# EAGLE board Maxim 7219 LED Display v1.1 (EAGLE 7.0.0)
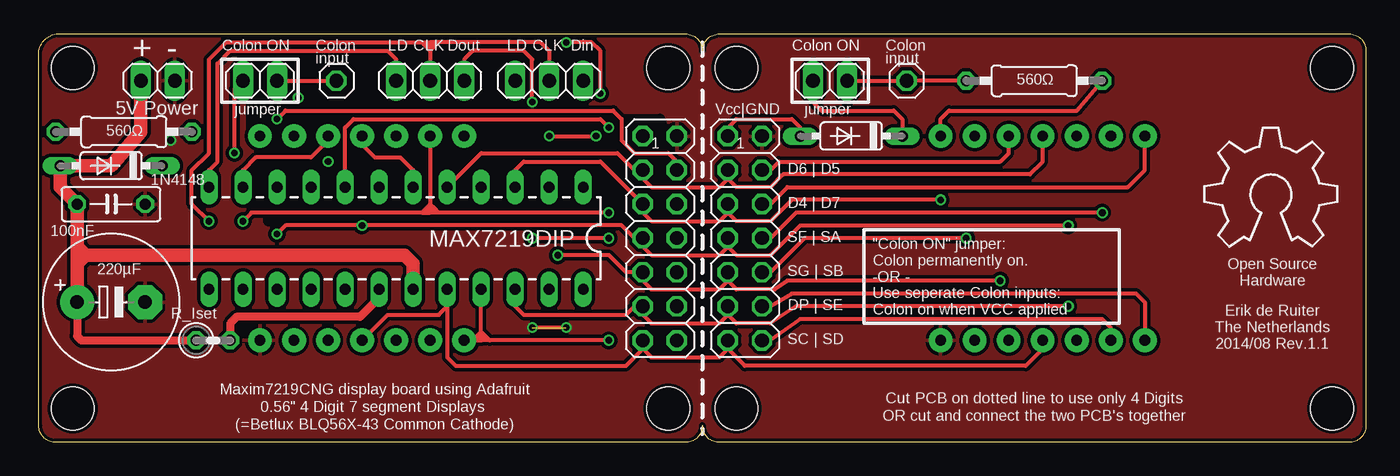
[diagram p0: board, top side]
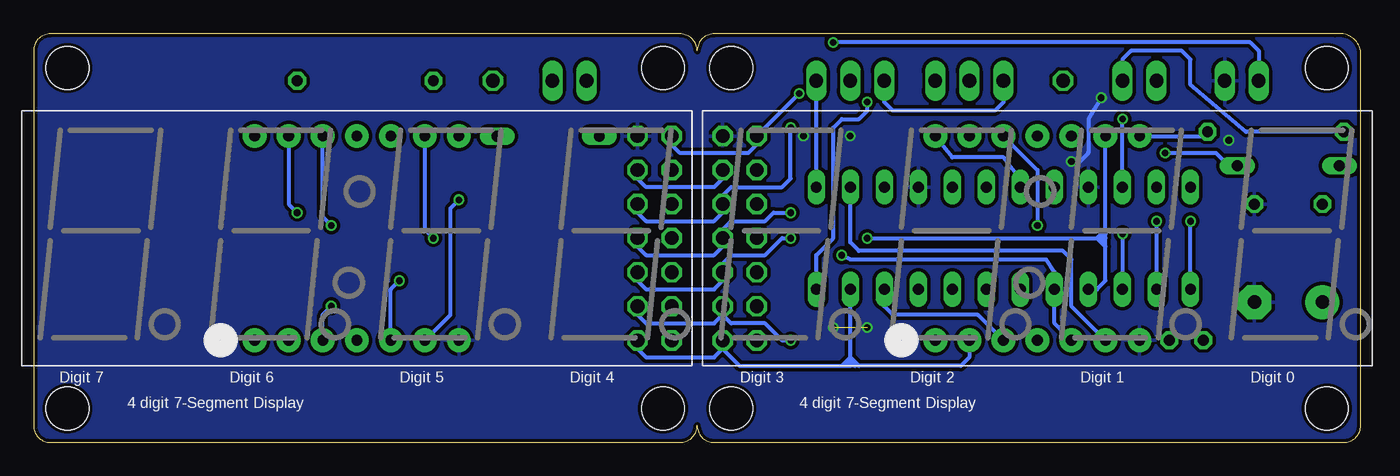
[diagram p1: board, bottom side, seen from below]

Size 99.06 x 30.51 mm. Coordinates in mm from the lower left corner, seen from the top.
Outline: 1.91,30.48 48.26,30.48 arc-90 49.53,29.21 arc-90 50.8,30.48 97.79,30.48 arc-90 99.06,29.21 99.06,1.27 arc-90 97.79,0 50.8,0 arc-90 49.53,1.27 arc-90 48.26,0 1.27,0 arc-90 0,1.27 0,29.21 arc-90 1.91,30.48
Copper layers (1*16): Top 0.035mm / dielectric 1.5mm / Bottom 0.035mm
Design rules "ITEADstudio_DRC": minimum track width 6mil, minimum drill 12mil, track to track 6mil, track to pad 6mil, pad to pad 6mil, via to via 6mil, smd to smd 0mil, copper to edge 10mil, drill to drill 10mil, minimum pad ring 10mil, minimum via ring 6mil, stop-mask expansion 2mil, vias tented up to drill 100mil, thermal gap 10mil
Holes 3.2 mm at 2.54,27.94 2.54,2.54 46.99,27.94 52.07,27.94 46.99,2.54 52.07,2.54 96.52,2.54 96.52,27.94
tRestrict: area 28.6,16.5 to 47.6,24.1; area 17.1,16.5 to 23.5,22.2; area 15.9,23.5 to 20.3,27.9; area 53.9,24.1 to 54.1,24.1

## Footprints (pad centres in the part's own frame; a part is rotated, then mirrored left to right if it is on the bottom)
SEGMENT-BL-Q56C43 = drill 0.8 pad 1.778: P$1 -7.62,-7.62; P$2 -5.08,-7.62; P$3 -2.54,-7.62; P$4 0,-7.62; P$5 2.54,-7.62; P$6 5.08,-7.62; P$7 7.62,-7.62; P$8 7.62,7.62; P$9 5.08,7.62; P$10 2.54,7.62; P$11 0,7.62; P$12 -2.54,7.62; P$13 -5.08,7.62; P$14 -7.62,7.62
E5-10,5 = drill 1.016 pad 2.54: + -2.54,0 | drill 1.016 pad 2.54 octagon: - 2.54,0
C050-025X075 = drill 0.813 octagon: 1 -2.54,0; 2 2.54,0
DO35-7 = drill 0.813 long: A 3.81,0; C -3.81,0
1X03 = drill 1.016 long: 1 -2.54,0; 2 0,0; 3 2.54,0
2X07 = drill 1.016 octagon: 1 -7.62,-1.27; 2 -7.62,1.27; 3 -5.08,-1.27; 4 -5.08,1.27; 5 -2.54,-1.27; 6 -2.54,1.27; 7 0,-1.27; 8 0,1.27; 9 2.54,-1.27; 10 2.54,1.27; 11 5.08,-1.27; 12 5.08,1.27; 13 7.62,-1.27; 14 7.62,1.27
1X01 = drill 1.016 octagon: 1 0,0
1X02 = drill 1.016 long: 1 -1.27,0; 2 1.27,0
0207/10 = drill 0.813 octagon: 1 -5.08,0; 2 5.08,0
0207/2V = drill 0.813 octagon: 1 -1.27,0; 2 1.27,0
DIL24 = drill 0.813 long: 1 -13.97,-3.81; 2 -11.43,-3.81; 3 -8.89,-3.81; 4 -6.35,-3.81; 5 -3.81,-3.81; 6 -1.27,-3.81; 7 1.27,-3.81; 8 3.81,-3.81; 9 6.35,-3.81; 10 8.89,-3.81; 11 11.43,-3.81; 12 13.97,-3.81; 13 13.97,3.81; 14 11.43,3.81; 15 8.89,3.81; 16 6.35,3.81; 17 3.81,3.81; 18 1.27,3.81; 19 -1.27,3.81; 20 -3.81,3.81; 21 -6.35,3.81; 22 -8.89,3.81; 23 -11.43,3.81; 24 -13.97,3.81

## Placement (x,y rotation side)
BL-Q56C-43UHR-1  4 digit 7-Segment Display  [SEGMENT-BL-Q56C43]  74.93,15.24 0 bottom
BL-Q56C-43UHR-11  4 digit 7-Segment Display  [SEGMENT-BL-Q56C43]  24.13,15.24 0 bottom
C3  220µF  [E5-10,5]  5.4,10.48 0 top
C4  100nF  [C050-025X075]  5.4,17.78 0 top
D2  1N4148  [DO35-7]  60.64,22.86 180 top
D3  1N4148  [DO35-7]  5.4,20.64 180 top
INPUT  [1X03]  38.1,26.99 180 top
LEFT  [2X07]  46.35,15.24 270 top
LEFT_COLON_EXTERNAL  M01SMDNS  [1X01]  64.77,26.99 0 top
LEFT_COLON_JUMPER_SELECT  [1X02]  59.05,26.99 180 top
OUTPUT  [1X03]  29.21,26.99 180 top
POWER  [1X02]  8.89,26.99 180 top
RCOLON1  560Ω  [0207/10]  6.35,23.18 0 top
RCOLON2  560Ω  [0207/10]  74.3,26.99 0 top
RIGHT  [2X07]  52.7,15.24 270 top
RIGHT_COLON_EXTERNAL  [1X01]  22.23,26.99 0 top
RIGHT_COLON_JUMPER_SELECT  [1X02]  16.51,26.99 180 top
RSET  [0207/2V]  13.02,7.62 0 top
U$2  [OSHW_8X350_NOTEXT]  87,14.61 0 top
U$3  MAX7219DIP  [DIL24]  26.67,15.24 180 top

## Library data of the parts
BL-Q56C-43UHR-1 BL-Q56C-43UHR-11 = microbuilder
C3 C4 RCOLON1 RCOLON2 RSET = rcl
D2 D3 = diode
INPUT LEFT LEFT_COLON_EXTERNAL LEFT_COLON_JUMPER_SELECT OUTPUT POWER RIGHT RIGHT_COLON_EXTERNAL RIGHT_COLON_JUMPER_SELECT = pinhead
U$2 = OpenSourceHardwareLogo
U$3 = SparkFun-DigitalIC

## Nets
CLK: INPUT.2 OUTPUT.2 U$3.13
DIG_0: BL-Q56C-43UHR-11.P$6 U$3.2
DIG_1: BL-Q56C-43UHR-11.P$10 U$3.11
DIG_2: BL-Q56C-43UHR-11.P$11 U$3.6
DIG_3: BL-Q56C-43UHR-11.P$14 U$3.7
DIG_4: BL-Q56C-43UHR-1.P$6 LEFT.5 RIGHT.5 U$3.3
DIG_5: BL-Q56C-43UHR-1.P$10 LEFT.4 RIGHT.4 U$3.10
DIG_6: BL-Q56C-43UHR-1.P$11 LEFT.3 RIGHT.3 U$3.5
DIG_7: BL-Q56C-43UHR-1.P$14 LEFT.6 RIGHT.6 U$3.8
DIN: INPUT.1 U$3.1
DOUT: OUTPUT.1 U$3.24
GND: BL-Q56C-43UHR-1.P$7 BL-Q56C-43UHR-11.P$7 C3.- C4.2 LEFT.2 POWER.1 RIGHT.2 U$3.4 U$3.9
LOAD: INPUT.3 OUTPUT.3 U$3.12
N$1: D2.C LEFT_COLON_JUMPER_SELECT.2
N$2: LEFT_COLON_EXTERNAL.1 LEFT_COLON_JUMPER_SELECT.1 RCOLON2.1
N$3: BL-Q56C-43UHR-1.P$8 RCOLON2.2
N$4: BL-Q56C-43UHR-11.P$8 RCOLON1.2
N$6: D3.C RIGHT_COLON_JUMPER_SELECT.2
N$7: RCOLON1.1 RIGHT_COLON_EXTERNAL.1 RIGHT_COLON_JUMPER_SELECT.1
N$9: RSET.2 U$3.18
SEG_A: BL-Q56C-43UHR-1.P$13 BL-Q56C-43UHR-11.P$13 LEFT.8 RIGHT.8 U$3.14
SEG_B: BL-Q56C-43UHR-1.P$9 BL-Q56C-43UHR-11.P$9 LEFT.10 RIGHT.10 U$3.16
SEG_C: BL-Q56C-43UHR-1.P$4 BL-Q56C-43UHR-11.P$4 LEFT.13 RIGHT.13 U$3.20
SEG_D: BL-Q56C-43UHR-1.P$2 BL-Q56C-43UHR-11.P$2 LEFT.14 RIGHT.14 U$3.23
SEG_DP: BL-Q56C-43UHR-1.P$3 BL-Q56C-43UHR-11.P$3 LEFT.11 RIGHT.11 U$3.22
SEG_E: BL-Q56C-43UHR-1.P$1 BL-Q56C-43UHR-11.P$1 LEFT.12 RIGHT.12 U$3.21
SEG_F: BL-Q56C-43UHR-1.P$12 BL-Q56C-43UHR-11.P$12 LEFT.7 RIGHT.7 U$3.15
SEG_G: BL-Q56C-43UHR-1.P$5 BL-Q56C-43UHR-11.P$5 LEFT.9 RIGHT.9 U$3.17
VCC: C3.+ C4.1 D2.A D3.A LEFT.1 POWER.2 RIGHT.1 RSET.1 U$3.19

## Tracks (layer width: path | path; a pad name or v marks a point on that pad's centre or on a via)
CLK  (via drill 0.5 pad 0.25)
  Top 0.305: 29.21,29.84 29.21,29.21 | 29.21,29.21 OUTPUT.2 | 29.84,29.84 37.47,29.84 38.1,29.21 INPUT.2 | 29.84,29.84 29.21,29.84 | v12.7,16.51 11.43,17.78 11.43,20.32 12.7,21.59 12.7,28.57 13.97,29.84 28.57,29.84 | 28.57,29.84 29.21,29.84 | 28.57,29.84 28.89,29.53 | 28.89,29.53 29.21,29.21 | 29.21,29.21 29.84,29.84 | 29.84,29.84 28.89,29.53
  Bottom 0.305: U$3.13 v12.7,16.51
DIG_0
  Bottom 0.305: BL-Q56C-43UHR-11.P$6 21.59,10.16 21.59,13.65 22.23,14.29 37.47,14.29 38.1,14.92 U$3.2
DIG_1
  Top 0.305: BL-Q56C-43UHR-11.P$10 21.59,22.54 20.32,21.27 16.19,21.27 15.24,20.32 U$3.11
DIG_2
  Top 0.305: BL-Q56C-43UHR-11.P$11 24.13,22.22 25.08,21.27 26.99,21.27 27.94,20.32 U$3.6
DIG_3
  Bottom 0.305: U$3.7 25.4,19.68 26.67,21.27 30.48,21.27 BL-Q56C-43UHR-11.P$14
DIG_4  (via drill 0.5 pad 0.25)
  Top 0.305: U$3.3 35.56,20.32 36.2,20.95 41.91,20.95 LEFT.5 45.09,17.14 45.72,16.51 50.8,16.51 51.44,17.14 | 51.44,17.14 RIGHT.5 | v67.31,18.1 56.2,18.1 54.61,16.51 52.07,16.51 51.44,17.14
  Bottom 0.305: BL-Q56C-43UHR-1.P$6 67.94,9.53 67.94,17.46 v67.31,18.1
DIG_5  (via drill 0.5)
  Top 0.305: BL-Q56C-43UHR-1.P$10 72.39,21.59 71.75,20.95 55.24,20.95 54.61,20.32 RIGHT.4 | v17.78,24.13 18.41,24.76 42.86,24.76 43.5,24.13 43.5,22.54 44.45,21.59 46.99,21.59 47.62,20.95 LEFT.4
  Bottom 0.305: U$3.10 v17.78,24.13 | LEFT.4 47.62,19.68 48.26,19.05 53.34,19.05 53.98,19.68 RIGHT.4
DIG_6
  Top 0.305: BL-Q56C-43UHR-1.P$11 74.93,20.95 73.98,20 55.56,20 54.61,19.05 52.07,19.05 51.44,19.68 | U$3.5 31.75,20.32 33.02,21.59 43.18,21.59 44.45,20.32 LEFT.3 45.09,19.68 45.72,19.05 50.8,19.05 51.44,19.68 | 51.44,19.68 RIGHT.3
DIG_7  (via drill 0.5)
  Top 0.305: BL-Q56C-43UHR-1.P$14 82.55,20.32 81.28,19.05 55.88,19.05 54.61,17.78 RIGHT.6 | U$3.8 22.86,23.49 23.5,24.13 41.91,24.13 v42.55,23.49
  Bottom 0.305: RIGHT.6 53.98,17.14 53.34,16.51 48.26,16.51 47.62,17.14 LEFT.6 47.62,18.41 46.99,19.05 43.18,19.05 42.55,19.68 v42.55,23.49
DIN
  Bottom 0.305: U$3.1 INPUT.1
DOUT  (via drill 0.5)
  Top 0.305: OUTPUT.1 31.75,28.57 32.38,29.21 36.2,29.21 36.83,28.57 v36.83,25.4
  Bottom 0.305: U$3.24 40.64,13.97 39.37,15.24 39.37,23.49 38.73,24.13 37.47,24.13 36.83,24.76 v36.83,25.4
GND  (via drill 0.5 pad 0.25)  (1 unrouted)
  Top 0.305: v38.1,22.86 v41.59,22.86
  Bottom 0.305: v19.37,25.72 20.32,24.13 20.32,21.69 arc45 20.39,21.52 20.95,20.95 v21.59,20.95
  other vias: 9.84,22.54 36.83,8.57 39.37,8.57
  pour Bottom (isolate 0.254): 0,30.48 99.06,30.48 99.06,0 0,0
  pour Top (isolate 0.254): 0,30.48 99.06,30.48 99.06,0 0,0
LOAD
  Top 0.305: OUTPUT.3 26.67,28.57 26.04,29.21 14.29,29.21 13.34,28.26 13.34,20.95 12.7,20.32 U$3.12
  Bottom 0.305: OUTPUT.3 26.67,25.4 27.3,24.76 34.92,24.76 35.56,25.4 INPUT.3
N$1
  Top 0.305: LEFT_COLON_JUMPER_SELECT.2 57.78,25.4 58.42,24.76 63.82,24.76 64.45,24.13 D2.C
N$2
  Top 0.305: LEFT_COLON_JUMPER_SELECT.1 LEFT_COLON_EXTERNAL.1 RCOLON2.1
N$3
  Top 0.305: BL-Q56C-43UHR-1.P$8 67.31,24.13 67.94,24.76 77.47,24.76 RCOLON2.2
N$4
  Bottom 0.305: BL-Q56C-43UHR-11.P$8 11.75,22.86 RCOLON1.2
N$5
  Top 0.305: 39.37,8.57 36.83,8.57
N$6  (via drill 0.5 pad 0.25)
  Top 0.305: v14.61,21.59 14.61,26.35 RIGHT_COLON_JUMPER_SELECT.2
  Bottom 0.305: D3.C 9.84,20.64 10.79,21.59 v14.61,21.59
N$7
  Top 0.305: RIGHT_COLON_JUMPER_SELECT.1 RIGHT_COLON_EXTERNAL.1
  Bottom 0.305: RCOLON1.1 8.57,23.18 12.7,26.67 12.7,28.57 13.34,29.21 17.14,29.21 17.78,28.57 RIGHT_COLON_JUMPER_SELECT.1
N$9
  Top 0.61: U$3.18 25.4,10.79 23.97,9.37 14.76,9.37 14.29,8.89 RSET.2
SEG_A  (via drill 0.5, 0.5 pad 0.25)
  Top 0.305: BL-Q56C-43UHR-11.P$13 29.21,17.78 | 29.21,17.78 29.21,17.14 | 28.57,17.14 15.88,17.14 v15.24,16.51 | v42.55,17.14 29.84,17.14 | 29.84,17.14 29.21,17.14 | v79.38,17.14 56.52,17.14 54.61,15.24 RIGHT.8 | 29.21,17.78 28.57,17.14 | 28.57,17.14 28.89,17.14 | 28.89,17.14 29.21,17.14 | 29.84,17.14 29.53,17.46 | 29.53,17.46 29.21,17.78 | 29.21,17.78 28.89,17.14 | 28.89,17.14 29.53,17.46
  Bottom 0.305: v15.24,16.51 U$3.14 | BL-Q56C-43UHR-1.P$13 80.01,17.78 v79.38,17.14 | RIGHT.8 53.98,14.61 53.34,13.97 48.26,13.97 47.62,14.61 LEFT.8 47.62,15.88 46.99,16.51 44.45,16.51 43.81,17.14 v42.55,17.14
SEG_B  (via drill 0.5, 0.5 pad 0.25)
  Top 0.305: v42.55,15.24 v36.83,15.24 | v69.22,15.24 57.15,15.24 54.61,12.7 RIGHT.10
  Bottom 0.305: U$3.16 19.68,11.43 19.05,12.06 19.05,14.61 | 19.05,14.61 19.05,15.24 | 19.05,15.24 19.05,15.56 | 19.05,15.56 19.05,15.88 | 19.05,15.88 BL-Q56C-43UHR-11.P$9 | v36.83,15.24 19.68,15.24 | 19.68,15.24 19.37,15.24 | 19.37,15.24 19.05,15.24 | v69.22,15.24 69.85,15.88 BL-Q56C-43UHR-1.P$9 | RIGHT.10 53.98,12.06 53.34,11.43 48.26,11.43 47.62,12.06 LEFT.10 47.62,13.34 46.99,13.97 44.45,13.97 43.18,15.24 v42.55,15.24 | 19.05,15.88 19.68,15.24 | 19.68,15.24 19.05,14.61 | 19.05,14.61 19.37,15.24 | 19.37,15.24 19.05,15.56
SEG_C
  Top 0.305: BL-Q56C-43UHR-11.P$4 26.04,9.53 29.84,9.53 30.48,10.16 | 30.48,10.16 U$3.20 | 30.48,10.16 30.48,6.35 31.11,5.71 43.81,5.71 45.09,6.99 | BL-Q56C-43UHR-1.P$4 74.93,6.99 73.66,5.71 52.7,5.71 51.44,6.99 | 51.44,6.99 RIGHT.13 | LEFT.13 45.09,6.99 | 45.09,6.99 45.72,6.35 50.8,6.35 51.44,6.99
SEG_D
  Top 0.305: BL-Q56C-43UHR-1.P$2 80.01,8.57 79.38,9.21 56.83,9.21 54.61,7.62 RIGHT.14
  Bottom 0.305: BL-Q56C-43UHR-11.P$2 29.21,6.35 29.84,5.71 37.47,5.71 | 37.47,5.71 37.78,5.71 | 37.78,5.71 38.1,5.71 | 38.1,5.71 38.1,6.35 | 38.1,6.35 U$3.23 | LEFT.14 47.62,6.99 | 47.62,6.99 46.35,5.71 38.73,5.71 | RIGHT.14 53.98,6.99 53.34,6.35 48.26,6.35 47.62,6.99 | 38.1,6.35 38.42,6.03 | 38.42,6.03 38.73,5.71 | 38.73,5.71 38.1,5.71 | 37.47,5.71 38.1,6.35 | 38.1,6.35 37.78,5.71 | 37.78,5.71 38.42,6.03
SEG_DP  (via drill 0.5 pad 0.25)
  Top 0.305: U$3.22 35.56,10.16 36.2,9.53 43.81,9.53 44.45,10.16 LEFT.11 45.09,9.53 45.72,8.89 50.8,8.89 51.44,9.53 | 51.44,9.53 RIGHT.11 | v76.83,10.16 56.52,10.16 54.61,8.89 52.07,8.89 51.44,9.53
  Bottom 0.305: BL-Q56C-43UHR-11.P$3 28.57,9.53 34.92,9.53 35.56,10.16 U$3.22 | BL-Q56C-43UHR-1.P$3 77.47,9.53 v76.83,10.16
SEG_E  (via drill 0.5 pad 0.25)
  Top 0.305: BL-Q56C-43UHR-11.P$1 32.38,7.62 | 32.38,7.62 32.7,7.62 | 32.7,7.62 33.02,7.62 | 33.02,7.62 33.02,8.26 | 33.02,8.26 U$3.21 | v42.55,7.62 33.66,7.62 | BL-Q56C-43UHR-1.P$1 82.55,10.48 81.92,11.11 56.2,11.11 54.61,10.16 RIGHT.12 | 33.02,8.26 33.34,7.94 | 33.34,7.94 33.66,7.62 | 33.66,7.62 33.02,7.62 | 32.38,7.62 33.02,8.26 | 33.02,8.26 32.7,7.62 | 32.7,7.62 33.34,7.94
  Bottom 0.305: v42.55,7.62 43.18,7.62 44.45,8.89 46.99,8.89 47.62,9.53 | RIGHT.12 53.98,9.53 53.34,8.89 48.26,8.89 47.62,9.53 | 47.62,9.53 LEFT.12
SEG_F  (via drill 0.5, 0.5 pad 0.25)
  Top 0.305: v17.78,15.56 18.41,16.19 v24.13,16.19 43.5,16.19 44.45,15.24 LEFT.7 45.09,14.61 45.72,13.97 50.8,13.97 51.44,14.61 | RIGHT.7 51.44,14.61 | 51.44,14.61 52.07,13.97 54.61,13.97 56.83,16.19 v76.83,16.19
  Bottom 0.305: BL-Q56C-43UHR-11.P$12 24.13,20.32 v24.13,16.19 | v17.78,15.56 U$3.15 | v76.83,16.19 77.47,16.83 BL-Q56C-43UHR-1.P$12
SEG_G  (via drill 0.5 pad 0.25)
  Top 0.305: v38.73,13.97 42.55,13.97 43.81,12.7 LEFT.9 45.09,12.06 45.72,11.43 50.8,11.43 51.44,12.06 | 51.44,12.06 RIGHT.9 | v71.75,12.06 55.88,12.06 54.93,11.43 52.07,11.43 51.44,12.06
  Bottom 0.305: BL-Q56C-43UHR-11.P$5 22.86,8.89 U$3.17 22.86,12.7 23.5,13.65 38.1,13.65 v38.73,13.97 | BL-Q56C-43UHR-1.P$5 72.39,11.43 v71.75,12.06
VCC  (via drill 0.5)
  Top 0.305: RIGHT.1 51.44,23.49 52.07,24.13 56.2,24.13 56.83,23.49 D2.A | v41.91,26.04 41.91,29.21 41.27,29.84 v39.37,29.84
  Top 0.61: C3.+ 2.86,7.94 3.17,7.62 RSET.1
  Top 1.016: U$3.19 27.94,13.34 27.3,13.97 3.49,13.97 | 3.49,13.97 2.86,13.34 | 2.86,13.34 C3.+ | 2.86,14.61 C4.1 1.59,19.05 D3.A 5.4,20.64 7.62,23.18 POWER.2 | 2.86,14.61 3.49,13.97 | 2.86,14.61 2.86,13.34
  Bottom 0.305: v39.37,29.84 8.26,29.84 7.62,29.21 POWER.2 | v41.91,26.04 LEFT.1 45.09,22.33 arc45 45.16,22.15 45.72,21.59 50.8,21.59 51.44,22.22 RIGHT.1

## Text on the board
tNames: Colon ON | Colon | LD | CLK | Dout | LD | CLK | Din | Colon ON | Colon | + | - | input | input | 5V Power | jumper | Vcc|GND | jumper | 1 | 1 | 1N4148 | D6 | D5 | D4 | D7 | 100nF | SF | SA | 220µF | SG | SB | Open Source / Hardware | R_Iset | DP | SE | "Colon ON" jumper: / Colon permanently on. / -OR - / Use seperate Colon inputs: / Colon on when VCC applied | SC | SD | Erik de Ruiter / The Netherlands / 2014/08 Rev.1.1 | Maxim7219CNG display board using Adafruit / 0.56" 4 Digit 7 segment Displays / (=Betlux BLQ56X-43 Common Cathode) | Cut PCB on dotted line to use only 4 Digits / OR cut and connect the two PCB's together
bNames: Digit 0 | Digit 1 | Digit 2 | Digit 3 | Digit 4 | Digit 5 | Digit 6 | Digit 7
bDocu: F | COLON | COLON | E